# Altium PCB SUBBOARD-sensors.PcbDoc (part 1 of 2)
Units mm, origin at the board's own origin, x right, y up, seen from the top; angles counter-clockwise.
Board outline 150 x 85 mm, 2 copper layers (Top Layer, Bottom Layer), stack 1.639 mm thick; 142 components, 91 nets, 388 pads, 124 vias.
Unrouted connection lines stored in the file: 3.
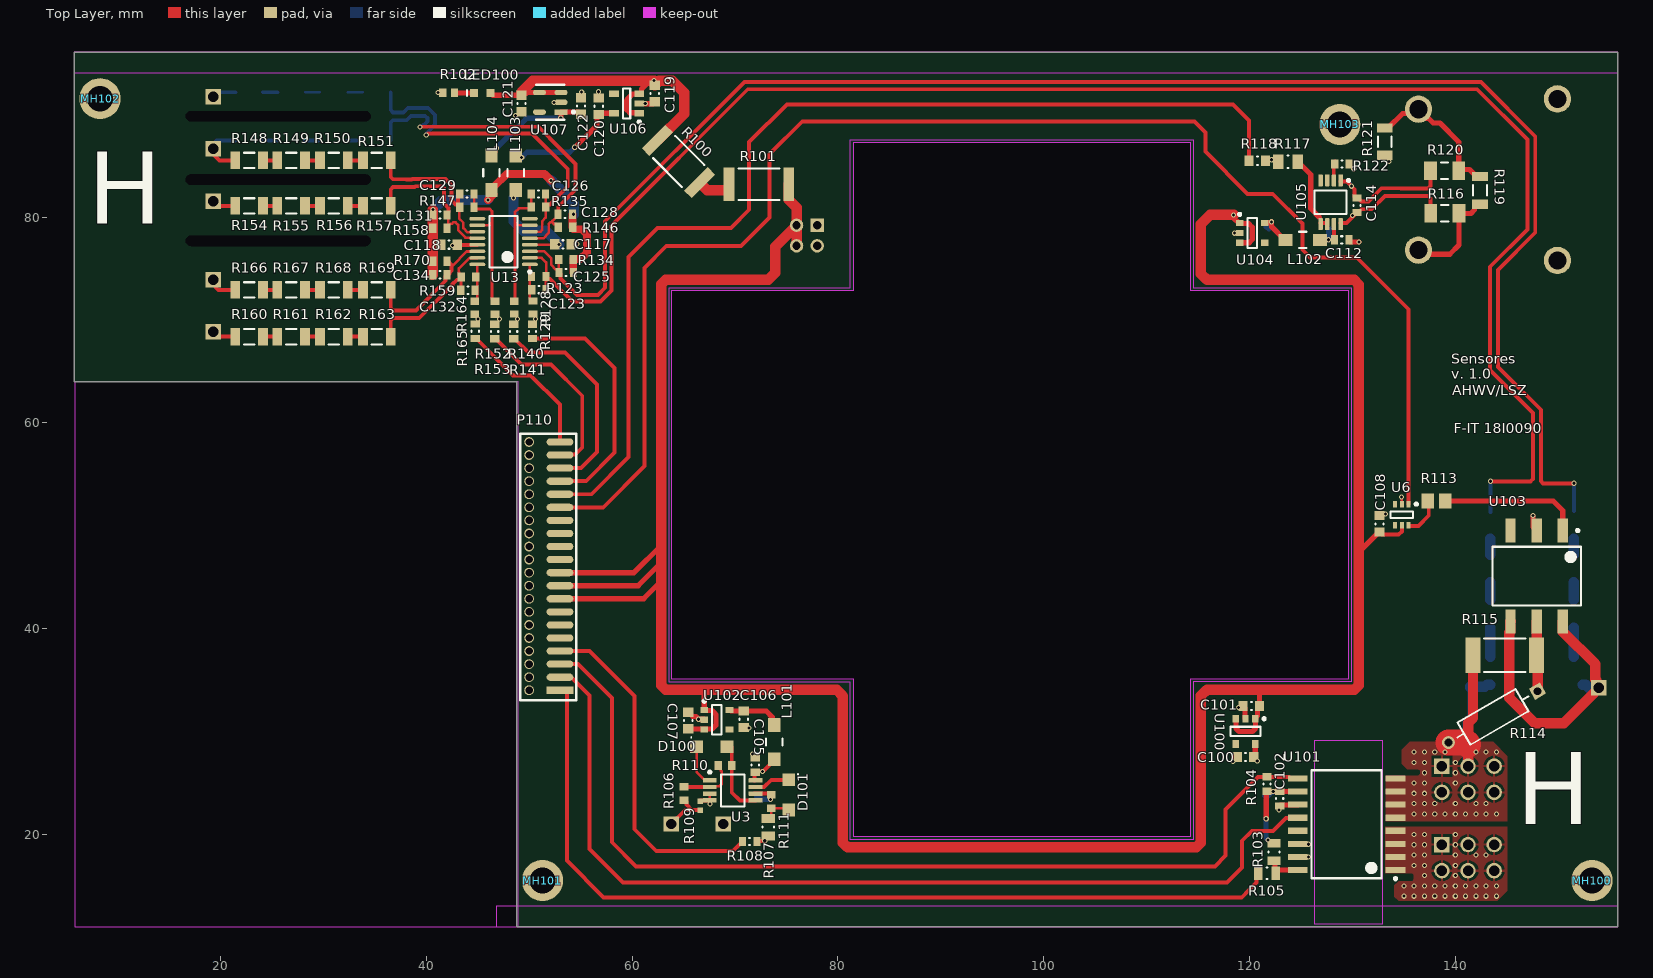
[diagram p0: Top Layer view]
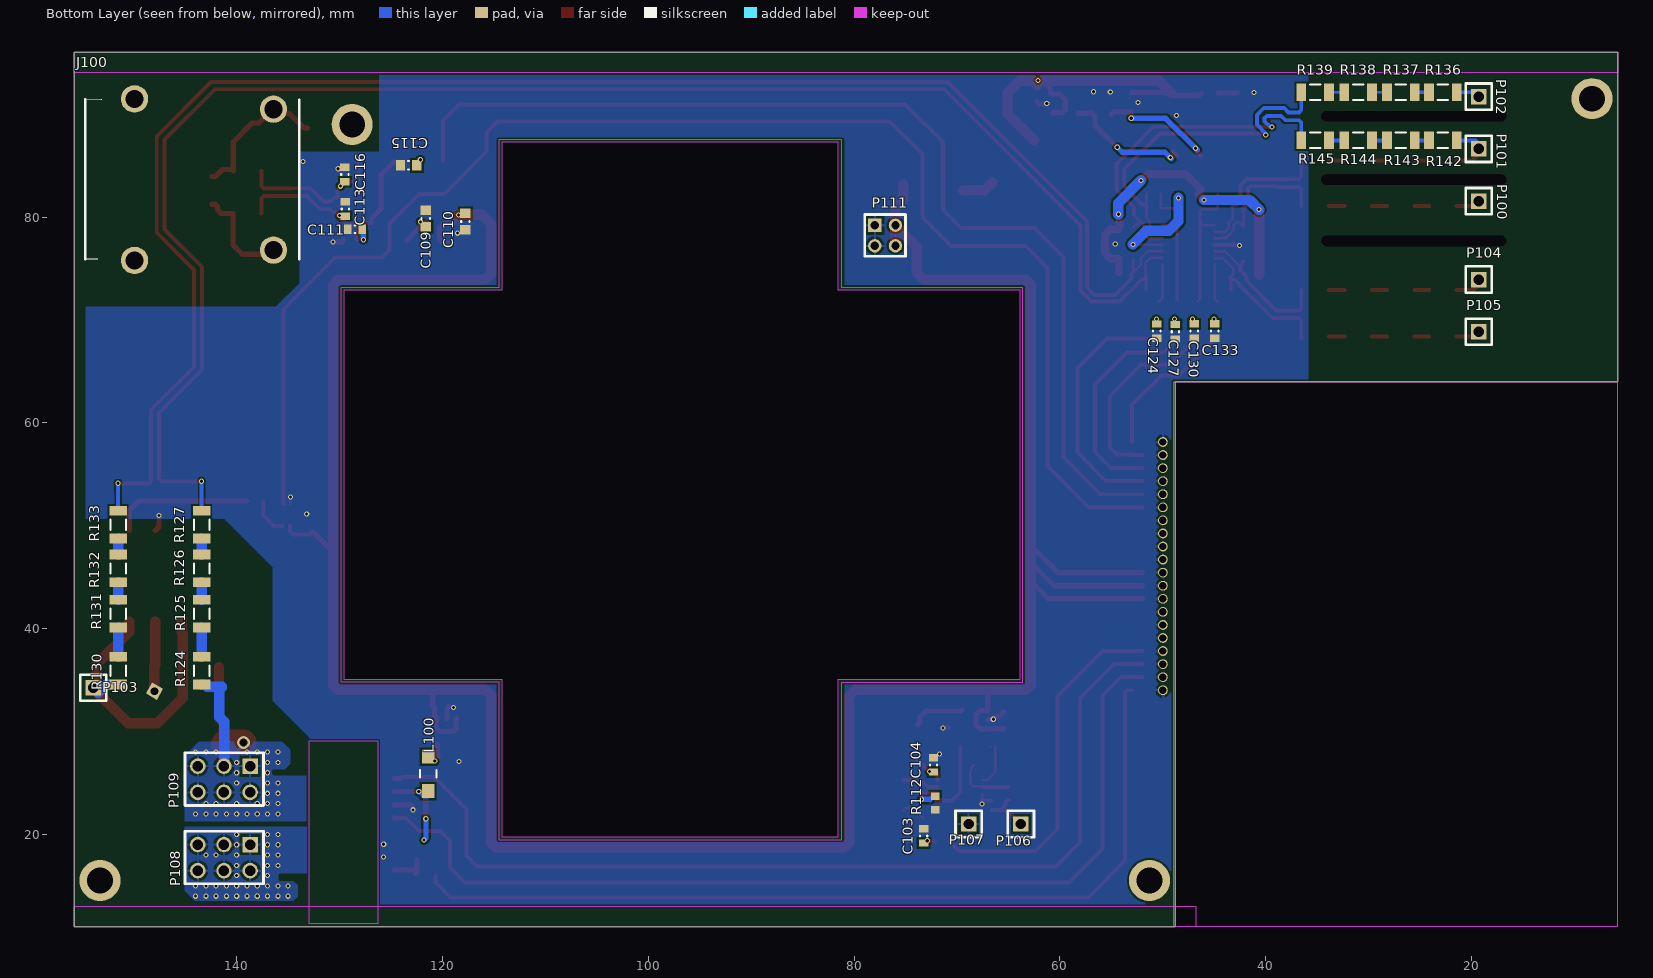
[diagram p1: Bottom Layer view, seen from below]

## Layer stack, top to bottom
Top Solder: solder mask 0.0254, SM-001, Dk 4
Top Layer: signal copper 0.07
Dielectric 1: core 1.4986, Core-043, Dk 4.3
Bottom Layer: signal copper 0.07
Bottom Solder: solder mask 0.0254, SM-001, Dk 4

## Board outline
5.778,64.017 48.778,64.017 48.778,11.017 155.778,11.017 155.778,96.017 5.778,96.017
cut-out: 81.538,87.284 114.218,87.284 114.218,72.879 129.611,72.879 129.611,35.079 114.218,35.079 114.218,19.774 81.538,19.774 81.538,35.079 63.861,35.079 63.861,72.879 81.538,72.879

## Design rules (kind name [scope] priority, off if disabled: settings)
Clearance [All] p1: gap=0.203 ignorepadtopadclearanceinfootprint=FALSE except(0: Arc-Hole Track-Hole SMDPad-Hole THPad-Hole Via-Hole Fill-Hole Poly-Hole Region-Hole Text-Hole)
DiffPairsRouting [All] p1: maxlimit=0.508 minlimit=0.254 mostfreqgap=0.381 toplayer_minwidth=0.254 toplayer_maxwidth=0.381 toplayer_prefwidth=0.381 bottomlayer_minwidth=0.254 bottomlayer_maxwidth=0.381 bottomlayer_prefwidth=0.381 maxuncoupledlength=12.7
PolygonConnect [All] p1: thpad.connectstyle=Relief thpad.reliefconductorwidth=0.254 thpad.reliefentries=4 thpad.polygonreliefangle="90 Angle" thpad.airgapwidth=0.254 smdpad.connectstyle=Direct smdpad.reliefconductorwidth=0.254 smdpad.reliefentries=4 smdpad.polygonreliefangle="90 Angle" smdpad.airgapwidth=0.254 via.connectstyle=Direct via.reliefconductorwidth=0.254 via.reliefentries=4 via.polygonreliefangle="90 Angle" via.airgapwidth=0.254
RoomDefinition U_voltage_sensor_HiZ_OpAmp [InComponentClass('U_voltage_sensor_HiZ_OpAmp')] p1: confinementstyle=ConfineIn formatcopy=TRUE lockcomponents=FALSE outline 1.158,24.272 161.87,24.272 161.87,145.489 1.158,145.489
RoomDefinition SUBBOARD-sensors [InComponentClass('SUBBOARD-sensors')] p2: confinementstyle=ConfineIn formatcopy=TRUE lockcomponents=FALSE outline 0,7.887 163.746,7.887 163.746,107.299 0,107.299
RoomDefinition U_sstate_relay_discharge [InComponentClass('U_sstate_relay_discharge')] p3: confinementstyle=ConfineIn formatcopy=TRUE lockcomponents=FALSE outline 131.654,26.945 178.44,26.945 178.44,60.655 131.654,60.655
RoomDefinition U_thermocouple [InComponentClass('U_thermocouple')] p4: confinementstyle=ConfineIn formatcopy=TRUE lockcomponents=FALSE outline 115.868,75.941 167.994,75.941 167.994,89.532 115.868,89.532
RoomDefinition U_current_sensor_transformer [InComponentClass('U_current_sensor_transformer')] p5: confinementstyle=ConfineIn formatcopy=TRUE lockcomponents=FALSE outline 57.583,4.224 78.67,4.224 78.67,34.574 57.583,34.574
RoomDefinition U_current_sensor_hall [InComponentClass('U_current_sensor_hall')] p6: confinementstyle=ConfineIn formatcopy=TRUE lockcomponents=FALSE outline 144.91,34.824 114.517,34.824 114.517,4.99 144.91,4.99
RoutingVias [All] p1: holewidth=0.711 width=1.27 viastyle="Through Hole" minholewidth=0.3 minwidth=0.5 maxholewidth=0.711 maxwidth=1.27
SolderMaskExpansion [All] p1: expansion=0.102 istentingtop=FALSE
Width [All] p1: maxlimit=2.54 minlimit=0.254 preferedwidth=0.508
29 further rules are at their usual default settings.

## Classes and differential pairs
component class U_sstate_relay_discharge: C108 R113 R114 R115 U6 U103
component class U_thermocouple: C109 C110 C111 C112 C113 C114 C115 C116 L102 R116 R117 R118 R119 R120 R121 R122 U104 U105
component class U_current_sensor_transformer: C103 C104 C105 C106 C107 D100 D101 L101 R106 R107 R108 R109 R110 R111 R112 U3 U102
component class SUBBOARD-sensors: J100 LED100 MH100 MH101 MH102 MH103 P100 P101 P102 P103 P104 P105 P106 P107 P108 P109 P110 P111 R100 R101 R102
component class U_voltage_sensor_HiZ_OpAmp: C117 C118 C119 C120 C121 C122 C123 C124 C125 C126 C127 C128 C129 C130 C131 C132 C133 C134 L103 L104 R123 R124 R125 R126 R127 R128 R129 R130 R131 R132 R133 R134 R135 R136 R137 R138 R139 R140 R141 R142 R143 R144 R145 R146 R147 R148 R149 R150 R151 R152 R153 R154 R155 R156 R157 R158 R159 R160 R161 R162 R163 R164 R165 R166 R167 R168 R169 R170 U13 U106 U107
component class U_current_sensor_hall: C100 C101 C102 L100 R103 R104 R105 U100 U101
differential pair TCKF: +TCKF_P -TCKF_N
differential pair Ch4: +Ch4_P -Ch4_N
differential pair Ch3: +Ch3_P -Ch3_N
differential pair Ch2: +Ch2_P -Ch2_N
differential pair Ch1: +Ch1_P -Ch1_N

## Components (designator, comment, footprint, x,y, rotation, side; value= is the part's Value field where it differs from the comment)
C100 "CAP 1uF 50V 0603(1608)" CAPC0603(1608)100_N 119.606,27.522 r0 top value=1uF
C101 "CAP 1uF 50V 0603(1608)" CAPC0603(1608)100_N 120.174,32.484 r0 top value=1uF
C102 "CAP 100nF 10V 0603(1608)" CAPC0603(1608)100_L 122.93,23.477 r90 top value=100nF
C103 "CAP 100nF 10V 0603(1608)" CAPC0603(1608)100_L 73.232,19.859 r270 bottom value=100nF
C104 "CAP 1uF 50V 0603(1608)" CAPC0603(1608)100_L 72.28,26.766 r270 bottom value=1uF
C105 "CAP 100nF 10V 0603(1608)" CAPC0603(1608)100_L 71.961,26.755 r270 top value=100nF
C106 "CAP 1uF 50V 0603(1608)" CAPC0603(1608)100_N 70.833,31.198 r90 top value=1uF
C107 "CAP 1uF 50V 0603(1608)" CAPC0603(1608)100_N 65.437,31.079 r270 top value=1uF
C108 "CAP 1uF 50V 0603(1608)" CAPC0603(1608)100_N 132.63,50.193 r270 top value=1uF
C109 "CAP 1uF 50V 0603(1608)" CAPC0603(1608)100_N 121.621,79.872 r270 bottom value=1uF
C110 "CAP 1uF 50V 0603(1608)" CAPC0603(1608)100_N 117.776,79.576 r90 bottom value=1uF
C111 "CAP 1uF 50V 0603(1608)" CAPC0603(1608)100_L 128.498,78.827 r180 bottom value=1uF
C112 "CAP 100nF 50V 0603(1608)" CAPC0603(1608)100_L 128.96,77.794 r180 top value=100nF
C113 "CAP 1nF 25V 0603(1608)" CAPC0603(1608)100_L 129.441,80.791 r270 bottom value=1nF
C114 "CAP 10nF 25V 0603(1608)" CAPC0603(1608)100_L 130.454,81.151 r90 top value=10nF
C115 "CAP 100nF 10V 0603(1608)" CAPC0603(1608)100_N 123.29,85.039 r180 bottom value=100nF
C116 "CAP 1nF 25V 0603(1608)" CAPC0603(1608)100_L 129.489,84.147 r90 bottom value=1nF
C117 "CAP 100nF 10V 0603(1608)" CAPC0603(1608)100_N 53.257,77.355 r180 top value=100nF
C118 "CAP 100nF 10V 0603(1608)" CAPC0603(1608)100_N 42.197,77.329 r180 top value=100nF
C119 "CAP 1uF 50V 0603(1608)" CAPC0603(1608)100_N 62.185,92.027 r90 top value=1uF
C120 "CAP 1uF 50V 0603(1608)" CAPC0603(1608)100_N 56.743,90.78 r270 top value=1uF
C121 "CAP 100nF 10V 0603(1608)" CAPC0603(1608)100_N 49.23,91.039 r90 top value=100nF
C122 "CAP 100nF 10V 0603(1608)" CAPC0603(1608)100_N 55.022,90.796 r270 top value=100nF
C123 "CAP 47pF 50V 0603(1608)" CAPC0603(1608)100_L 50.927,72.953 r180 top value=47pF
C124 "CAP 100nF 10V 0603(1608)" CAPC0603(1608)100_L 50.576,68.929 r90 bottom value=100nF
C125 "CAP 47pF 50V 0603(1608)" CAPC0603(1608)100_L 53.579,74.614 r0 top value=47pF
C126 "CAP 47pF 50V 0603(1608)" CAPC0603(1608)100_L 50.881,82.261 r180 top value=47pF
C127 "CAP 100nF 10V 0603(1608)" CAPC0603(1608)100_L 48.768,68.865 r90 bottom value=100nF
C128 "CAP 47pF 50V 0603(1608)" CAPC0603(1608)100_L 53.485,80.278 r0 top value=47pF
C129 "CAP 47pF 50V 0603(1608)" CAPC0603(1608)100_L 43.93,82.242 r0 top value=47pF
C130 "CAP 100nF 10V 0603(1608)" CAPC0603(1608)100_L 46.933,68.931 r90 bottom value=100nF
C131 "CAP 47pF 50V 0603(1608)" CAPC0603(1608)100_L 41.309,80.2 r180 top value=47pF
C132 "CAP 47pF 50V 0603(1608)" CAPC0603(1608)100_L 44.026,72.899 r0 top value=47pF
C133 "CAP 100nF 10V 0603(1608)" CAPC0603(1608)100_L 44.931,68.931 r90 bottom value=100nF
C134 "CAP 47pF 50V 0603(1608)" CAPC0603(1608)100_L 41.309,74.396 r180 top value=47pF
D100 "NRVB120VLSFT1G" NRVB120VLSFT1G 67.729,28.518 r0 top
D101 "NRVB120VLSFT1G" NRVB120VLSFT1G 75.203,23.839 r270 top
J100 "PRT-13612" PRT-13612 149.916,75.806 r90 bottom
L100 "742792111" SMD-1206 121.39,25.894 r90 bottom
L101 "742792111" SMD-1206 73.813,28.981 r270 top
L102 "742792111" SMD-1206 125.171,77.782 r0 top
L103 "742792111" SMD-1206 48.673,84.329 r270 top
L104 "742792111" SMD-1206 46.318,84.329 r270 top
LED100 "150060BS75000" 0603_A 45.429,92.07 r0 top
MH100 "_MH_2p5_4-round" _MH_2p5_4-round 153.278,15.517 r0 top
MH101 "_MH_2p5_4-round" _MH_2p5_4-round 51.278,15.517 r0 top
MH102 "_MH_2p5_4-round" _MH_2p5_4-round 8.278,91.517 r0 top
MH103 "_MH_2p5_4-round" _MH_2p5_4-round 128.778,89.017 r0 top
P100 "TSW-101-15-G-S" TSW-101-15-G-S 19.278,81.557 r180 bottom
P101 "TSW-101-15-G-S" TSW-101-15-G-S 19.278,86.637 r180 bottom
P102 "TSW-101-15-G-S" TSW-101-15-G-S 19.278,91.717 r180 bottom
P103 "TSW-101-15-G-S" TSW-101-15-G-S 153.938,34.257 r180 bottom
P104 "TSW-101-15-G-S" TSW-101-15-G-S 19.278,73.937 r180 bottom
P105 "TSW-101-15-G-S" TSW-101-15-G-S 19.278,68.857 r180 bottom
P106 "TSW-101-15-G-S" TSW-101-15-G-S 63.778,21.017 r180 bottom
P107 "TSW-101-15-G-S" TSW-101-15-G-S 68.858,21.017 r180 bottom
P108 "TSW-103-15-G-D" TSW-103-15-G-D 138.698,19.017 r270 bottom
P109 "TSW-103-15-G-D" TSW-103-15-G-D 138.698,26.637 r270 bottom
P110 "FTSH-120-01-F-MT" FTSH-120-01-F-MT 52.976,34.017 r180 top
P111 "TMM-102-02-T-D" TMM-102-02-T-D 77.974,79.214 r180 bottom
R100 "Jumper 2512(6432)" RESC2512(6432)_L 64.507,85.417 r315 top value="0.00 Ohm"
R101 "Jumper 2512(6432)" RESC2512(6432)_L 72.308,83.196 r180 top value="0.00 Ohm"
R102 "CRCW060382R0FKEA" RESC1609X50X30LL10T20 42.15,92.091 r180 top value="82 Ohms"
R103 "33K 5% 0805(2012)" RESC0805(2012)_L 122.38,18.302 r90 top value="33000.00 Ohm"
R104 "10K 5% 0603(1608)" RESC0603(1608)_L 121.696,24.901 r90 top value="10000.00 Ohm"
R105 "33K 5% 0805(2012)" RESC0805(2012)_L 121.704,16.23 r0 top value="33000.00 Ohm"
R106 "10000.00 Ohm" RESC1609X55X30LL15T15 65.027,23.978 r270 top
R107 "68R1 1% 0805(2012)" RESC0805(2012)_L 73.232,20.709 r90 top value="68.10 Ohm"
R108 "Jumper 0603(1608)" RESC0603(1608)_L 71.417,19.323 r0 top value="0.00 Ohm"
R109 "100.00 Ohm" RESC1005X40X25NL05T05 66.621,22.79 r270 top
R110 "10000.00 Ohm" RESC1609X55X30LL15T15 69.022,26.71 r180 top
R111 "10000.00 Ohm" RESC1609X55X30LL15T15 73.522,23.197 r270 top
R112 "10000.00 Ohm" RESC1609X55X30LL15T15 72.108,23.052 r270 bottom
R113 "ERA6AEB201V" RESC2013X60X40NL20T25 138.169,52.404 r0 top value="200 Ohm"
R114 "MRS25000C1101FCT00" FP-MRS25-MFG 143.662,31.433 r210 top value=1.1kΩ
R115 "1K 1% 2512(6432)" RESC2512(6432)_M 144.804,37.434 r0 top value="1000.00 Ohm"
R116 "CRCW120610K0FKEAHP" RESC3116X65X50NL20T20 138.986,80.368 r0 top value="10 kOhms"
R117 "68R1 1% 0805(2012)" RESC0805(2012)_N 123.74,85.399 r0 top value="68.10 Ohm"
R118 "Jumper 0603(1608)" RESC0603(1608)_N 120.758,85.488 r0 top value="0.00 Ohm"
R119 "CRCW12060000Z0EB" RESC3216X60X45LL10T20 142.402,82.61 r270 top value="0 Ohms"
R120 "CRCW120610K0FKEAHP" RESC3116X65X50NL20T20 138.96,84.492 r0 top value="10 kOhms"
R121 "ERJ-8GEYJ105V" RESC3216X70X50LL05T20 133.141,87.341 r90 top value="1 MOhms"
R122 "Jumper 0603(1608)" RESC0603(1608)_L 128.974,85.159 r0 top value="0.00 Ohm"
R123 "RC0603FR-0718KL" RESC1608X55X25NL10T15 50.914,74.242 r0 top
R124 "1M 1% 1206(3216)" RESC1206(3216)_L 143.406,35.918 r270 bottom value="1000000.00 Ohm"
R125 "1M 1% 1206(3216)" RESC1206(3216)_L 143.406,41.466 r270 bottom value="1000000.00 Ohm"
R126 "1M 1% 1206(3216)" RESC1206(3216)_L 143.406,45.854 r270 bottom value="1000000.00 Ohm"
R127 "1K 1% 1206(3216)" RESC1206(3216)_L 143.406,50.104 r270 bottom value="1000.00 Ohm"
R128 "ERJ-3EKF68R1V" RESC1608X55X30LL15T15 50.364,71.215 r90 top value="68.1 Ohm"
R129 "Jumper 0603(1608)" RESC0603(1608)_L 50.317,68.899 r90 top value="0.00 Ohm"
R130 "1M 1% 1206(3216)" RESC1206(3216)_L 151.525,35.918 r270 bottom value="1000000.00 Ohm"
R131 "1M 1% 1206(3216)" RESC1206(3216)_L 151.525,41.466 r270 bottom value="1000000.00 Ohm"
R132 "1M 1% 1206(3216)" RESC1206(3216)_L 151.525,45.854 r270 bottom value="1000000.00 Ohm"
R133 "1K 1% 1206(3216)" RESC1206(3216)_L 151.525,50.104 r270 bottom value="1000.00 Ohm"
R134 "RC0603FR-0718KL" RESC1608X55X25NL10T15 53.566,75.89 r0 top
R135 "RC0603FR-0718KL" RESC1608X55X25NL10T15 50.887,80.98 r0 top
R136 "1M 1% 1206(3216)" RESC1206(3216)_L 22.77,92.142 r180 bottom value="1000000.00 Ohm"
R137 "1M 1% 1206(3216)" RESC1206(3216)_L 26.856,92.142 r180 bottom value="1000000.00 Ohm"
R138 "1M 1% 1206(3216)" RESC1206(3216)_L 30.993,92.142 r180 bottom value="1000000.00 Ohm"
R139 "1K 1% 1206(3216)" RESC1206(3216)_L 35.175,92.142 r180 bottom value="1000.00 Ohm"
R140 "ERJ-3EKF68R1V" RESC1608X55X30LL15T15 48.528,71.201 r90 top value="68.1 Ohm"
R141 "Jumper 0603(1608)" RESC0603(1608)_L 48.477,68.886 r90 top value="0.00 Ohm"
R142 "1M 1% 1206(3216)" RESC1206(3216)_L 22.77,87.467 r180 bottom value="1000000.00 Ohm"
R143 "1M 1% 1206(3216)" RESC1206(3216)_L 26.856,87.467 r180 bottom value="1000000.00 Ohm"
R144 "1M 1% 1206(3216)" RESC1206(3216)_L 30.993,87.467 r180 bottom value="1000000.00 Ohm"
R145 "1K 1% 1206(3216)" RESC1206(3216)_L 35.175,87.467 r180 bottom value="1000.00 Ohm"
R146 "RC0603FR-0718KL" RESC1608X55X25NL10T15 53.511,79.015 r0 top
R147 "RC0603FR-0718KL" RESC1608X55X25NL10T15 43.932,80.963 r180 top
R148 "1M 1% 1206(3216)" RESC1206(3216)_L 22.77,85.511 r180 top value="1000000.00 Ohm"
R149 "1M 1% 1206(3216)" RESC1206(3216)_L 26.856,85.511 r180 top value="1000000.00 Ohm"
R150 "1M 1% 1206(3216)" RESC1206(3216)_L 30.993,85.511 r180 top value="1000000.00 Ohm"
R151 "1K 1% 1206(3216)" RESC1206(3216)_L 35.175,85.511 r180 top value="1000.00 Ohm"
R152 "ERJ-3EKF68R1V" RESC1608X55X30LL15T15 46.652,71.198 r90 top value="68.1 Ohm"
R153 "Jumper 0603(1608)" RESC0603(1608)_L 46.628,68.891 r90 top value="0.00 Ohm"
R154 "1M 1% 1206(3216)" RESC1206(3216)_L 22.77,81.091 r180 top value="1000000.00 Ohm"
R155 "1M 1% 1206(3216)" RESC1206(3216)_L 26.856,81.091 r180 top value="1000000.00 Ohm"
R156 "1M 1% 1206(3216)" RESC1206(3216)_L 30.993,81.091 r180 top value="1000000.00 Ohm"
R157 "1K 1% 1206(3216)" RESC1206(3216)_L 35.175,81.091 r180 top value="1000.00 Ohm"
R158 "RC0603FR-0718KL" RESC1608X55X25NL10T15 41.309,78.911 r180 top
R159 "RC0603FR-0718KL" RESC1608X55X25NL10T15 44.086,74.18 r180 top
R160 "1M 1% 1206(3216)" RESC1206(3216)_L 22.77,68.382 r180 top value="1000000.00 Ohm"
R161 "1M 1% 1206(3216)" RESC1206(3216)_L 26.856,68.382 r180 top value="1000000.00 Ohm"
R162 "1M 1% 1206(3216)" RESC1206(3216)_L 30.993,68.382 r180 top value="1000000.00 Ohm"
R163 "1K 1% 1206(3216)" RESC1206(3216)_L 35.175,68.382 r180 top value="1000.00 Ohm"
R164 "ERJ-3EKF68R1V" RESC1608X55X30LL15T15 44.703,71.198 r90 top value="68.1 Ohm"
R165 "Jumper 0603(1608)" RESC0603(1608)_L 44.739,68.915 r90 top value="0.00 Ohm"
R166 "1M 1% 1206(3216)" RESC1206(3216)_L 22.77,72.922 r180 top value="1000000.00 Ohm"
R167 "1M 1% 1206(3216)" RESC1206(3216)_L 26.856,72.922 r180 top value="1000000.00 Ohm"
R168 "1M 1% 1206(3216)" RESC1206(3216)_L 30.993,72.922 r180 top value="1000000.00 Ohm"
R169 "1K 1% 1206(3216)" RESC1206(3216)_L 35.175,72.922 r180 top value="1000.00 Ohm"
R170 "RC0603FR-0718KL" RESC1608X55X25NL10T15 41.309,75.711 r180 top
U3 "OPA2350EA/2K5" DGK0008A_N 69.765,24.287 r0 top
U6 "SN74LVC2G34DCKR" DCK0006A_L 134.806,51.079 r270 top
U13 "OPA4350EA/250G4" TI-DBQ16_L 47.494,77.628 r180 top
U100 "ADP122AUJZ-3.3-R7" ADI-UJ-5_L 119.614,30.021 r270 top
U101 "MCA1101-20-03" SOIC127P1030X265-16N 129.439,20.994 r180 top
U102 "ADP122AUJZ-3.3-R7" ADI-UJ-5_L 68.223,31.153 r0 top
U103 "PVT412LSPBF" SOP254P980X318-6M-PVT412LSPBF 147.909,45.116 r270 top
U104 "ADP122AUJZ-3.3-R7" ADI-UJ-5_L 120.264,78.468 r0 top
U105 "AD8495ARMZ" DGK0008A_L 127.879,81.451 r270 top
U106 "ADP122AUJZ-3.3-R7" ADI-UJ-5_N 59.457,91.05 r180 top
U107 "REF2033AIDDCR" FP-DDC0005A-IPC_C 52.033,91.168 r180 top

## Footprints (in the part's own frame and the unit in brackets; to place one, negate y for a bottom-side part, rotate by r counter-clockwise, add the part's x,y. Pads: shape width x height; smd on the part's side, far side on the other; paste and mask are expansions set on the pad)
0603_A [mm] "Chip LED, 2-Leads, Body 1.6x0.8mm, IPC Medium Density"
  rect 0.8x0.8 smd: 1(-0.8,0) 2(0.8,0)
  silkscreen extent -1.5,-0.3 -1.5,0.3, body extent -0.8,-0.4 0.8,0.4, height 0.7
_MH_2p5_4-round [mm] "Matching hole, 2.5mm hole, 4mm pad (round)"
  round 4 hole 2.5: *(0,0)
ADI-UJ-5_L [mm] "SOT23, 5-Leads, Body 2.9x1.6mm, Pitch 0.95mm, IPC High Density"
  rect 0.75x0.6 smd: 1(-1.225,0.95) 2(-1.225,0) 3(-1.225,-0.95) 4(1.225,-0.95) 5(1.225,0.95)
  silkscreen extent -1.35,-1.45 0.45,1.93, body extent -0.8,-1.45 0.8,1.45, height 1
ADI-UJ-5_N [mm] "SOT23, 5-Leads, Body 2.9x1.6mm, Pitch 0.95mm, IPC Medium Density"
  rect 0.95x0.6 smd: 1(-1.225,0.95) 2(-1.225,0) 3(-1.225,-0.95) 4(1.225,-0.95) 5(1.225,0.95)
  silkscreen extent -1.35,-1.45 0.35,1.92, body extent -0.8,-1.45 0.8,1.45, height 1
CAPC0603(1608)100_L [mm] "Chip Capacitor, Body 1.6x0.8mm, Height 1.0mm, IPC High Density"
  rect 0.7x0.9 smd: 1(-0.7,0) 2(0.7,0)
  silkscreen extent -0.05,-0.35 0.05,0.35, body extent -0.87,-0.47 0.88,0.48, height 1
CAPC0603(1608)100_N [mm] "Chip Capacitor, Body 1.6x0.8mm, Height 1.0mm, IPC Medium Density"
  rect 0.9x1 smd: 1(-0.8,0) 2(0.8,0)
  silkscreen extent -0.05,-0.4 0.05,0.4, body extent -0.87,-0.48 0.88,0.47, height 1
DCK0006A_L [mm] "SOT23, 6-Leads, Body 2.15x1.4mm, Pitch 0.65mm, IPC High Density"
  rrect25% 0.65x0.4 smd: 1(-1.025,0.65) 2(-1.025,0) 3(-1.025,-0.65) 4(1.025,-0.65) 5(1.025,0) 6(1.025,0.65)
  silkscreen extent -1.15,-1.1 0.3,1.53, body extent -1.14,-1 1.14,1, height 0.94
DGK0008A_L [mm] "TSOP, 8-Leads, Body 3.1x3.1mm, Pitch 0.65mm, IPC High Density"
  rrect22% 1.15x0.43 smd: 1(-2.125,0.975) 2(-2.125,0.325) 3(-2.125,-0.325) 4(-2.125,-0.975) 5(2.125,-0.975) 6(2.125,-0.325) 7(2.125,0.325) 8(2.125,0.975)
  silkscreen extent -2.25,-1.55 1.15,1.88, body extent -2.45,-1.5 2.45,1.5, height 0.94
DGK0008A_N [mm] "TSOP, 8-Leads, Body 3.1x3.1mm, Pitch 0.65mm, IPC Medium Density"
  rrect22% 1.35x0.43 smd: 1(-2.225,0.975) 2(-2.225,0.325) 3(-2.225,-0.325) 4(-2.225,-0.975) 5(2.225,-0.975) 6(2.225,-0.325) 7(2.225,0.325) 8(2.225,0.975)
  silkscreen extent -2.35,-1.55 1.15,1.9, body extent -2.45,-1.5 2.45,1.5, height 0.94
FP-DDC0005A-IPC_C [mm]
  rect 1.254x0.532 smd paste+0 mask+0: 1(-1.05,0.95)
  rrect100% 1.254x0.532 smd paste+0 mask+0: 2(-1.05,0) 3(-1.05,-0.95) 4(1.05,-0.95) 5(1.05,0.95)
  silkscreen extent -2.38,-1.7 1.4,1.7, body extent -1.78,-1.55 1.78,1.55, height 0.25
FP-MRS25-MFG [mm]
  rect 1.25x1.25 hole 0.75 paste-1000 mask+0: 1(-5,0)
  round 1.25 hole 0.75 paste-1000 mask+0: 2(5,0)
  silkscreen extent -3.98,-1.25 3.98,1.25, body extent -5.73,-1.35 5.73,1.35, height 0.25
FTSH-120-01-F-MT [mm] "Alojamientos de cables y cabecera .050\" Micro Terminal Strip"
  rect 2.6x0.7 smd: 1(0,0)
  round 0.95 hole 0.71: 2(3,0) 4(3,-1.27) 6(3,-2.54) 8(3,-3.81) 10(3,-5.08) 12(3,-6.35) 14(3,-7.62) 16(3,-8.89) 18(3,-10.16) 20(3,-11.43) 22(3,-12.7) 24(3,-13.97) 26(3,-15.24) 28(3,-16.51) 30(3,-17.78) 32(3,-19.05) 34(3,-20.32) 36(3,-21.59) 38(3,-22.86) 40(3,-24.13)
  oval 2.6x0.7 smd: 3(0,-1.27) 5(0,-2.54) 7(0,-3.81) 9(0,-5.08) 11(0,-6.35) 13(0,-7.62) 15(0,-8.89) 17(0,-10.16) 19(0,-11.43) 21(0,-12.7) 23(0,-13.97) 25(0,-15.24) 27(0,-16.51) 29(0,-17.78) 31(0,-19.05) 33(0,-20.32) 35(0,-21.59) 37(0,-22.86) 39(0,-24.13)
  silkscreen extent -1.6,-24.92 3.85,0.98, body extent -1.11,-24.73 9.79,0.67, height 3.44
NRVB120VLSFT1G [mm] "REEL / AUTO STANDARD OF MBR120VL"
  rect 1.25x1.22 smd: 1(-1.475,0) 2(1.475,0)
  silkscreen extent -2.05,0.86 -1.95,0.96, body extent -1.45,-0.9 1.45,0.9, height 0.98
PRT-13612 [mm] "THERMOCOUPLE CONN - PCC-SMP-K"
  round 2.655 hole 1.77: 1(-0.01,0.01) 2(15.69,0.01) 3(0.99,-13.49) 4(14.69,-13.49)
  silkscreen extent 0.09,-16 15.64,4.81, body extent 0.01,-16.04 15.71,4.76, height 7.65
RESC0603(1608)_L [mm] "Chip Resistor, Body 1.6x0.8mm, IPC High Density"
  rect 0.7x0.9 smd: 1(-0.7,0) 2(0.7,0)
  silkscreen extent -0.05,-0.35 0.05,0.35, body extent -0.85,-0.47 0.85,0.47, height 0.6
RESC0603(1608)_N [mm] "Chip Resistor, Body 1.6x0.8mm, IPC Medium Density"
  rect 0.9x1 smd: 1(-0.8,0) 2(0.8,0)
  silkscreen extent -0.05,-0.4 0.05,0.4, body extent -0.85,-0.47 0.85,0.47, height 0.6
RESC0805(2012)_L [mm] "Chip Resistor, Body 2.0x1.3mm, IPC High Density"
  rect 0.85x1.3 smd: 1(-0.85,0) 2(0.85,0)
  silkscreen extent -0.05,-0.55 0.05,0.55, body extent -1.1,-0.67 1.1,0.68, height 0.7
RESC0805(2012)_N [mm] "Chip Resistor, Body 2.0x1.3mm, IPC Medium Density"
  rect 1.05x1.4 smd: 1(-0.95,0) 2(0.95,0)
  silkscreen extent -0.05,-0.6 0.05,0.6, body extent -1.1,-0.67 1.1,0.68, height 0.7
RESC1005X40X25NL05T05 [mm] "Chip Resistor, 2-Leads, Body 1.00x0.50mm, IPC Medium Density"
  rect 0.55x0.55 smd: 1(-0.45,0) 2(0.45,0)
  body extent -0.53,-0.27 0.53,0.28, height 0.4
RESC1206(3216)_L [mm] "Chip Resistor, Body 3.2x1.6mm, IPC High Density"
  rect 0.95x1.7 smd: 1(-1.35,0) 2(1.35,0)
  silkscreen extent -0.5,-0.75 0.5,0.75, body extent -1.67,-0.87 1.67,0.87, height 0.75
RESC1608X55X25NL10T15 [mm] "Chip Resistor, 2-Leads, Body 1.70x0.90mm, IPC Medium Density"
  rect 0.7x0.9 smd: 1(-0.7,0) 2(0.7,0)
  body extent -0.85,-0.45 0.85,0.45, height 0.55
RESC1608X55X30LL15T15 [mm] "Chip Resistor, 2-Leads, Body 1.60x0.80mm, IPC High Density"
  rect 0.7x0.85 smd: 1(-0.625,0) 2(0.625,0)
  body extent -0.87,-0.48 0.87,0.48, height 0.55
RESC1609X50X30LL10T20 [mm] "Chip Resistor, 2-Leads, Body 1.55x0.85mm, IPC High Density"
  rect 0.7x0.85 smd: 1(-0.575,0) 2(0.575,0)
  body extent -0.82,-0.48 0.82,0.48, height 0.5
RESC1609X55X30LL15T15 [mm] "Chip Resistor, 2-Leads, Body 1.75x0.95mm, IPC High Density"
  rect 0.75x0.85 smd: 1(-0.65,0) 2(0.65,0)
  body extent -0.87,-0.48 0.87,0.48, height 0.55
RESC2013X60X40NL20T25 [mm] "Chip Resistor, 2-Leads, Body 2.00x1.25mm, IPC Medium Density"
  rect 1.2x1.45 smd: 1(-0.85,0) 2(0.85,0)
  body extent -1.1,-0.72 1.1,0.72, height 0.6
RESC2512(6432)_L [mm] "Chip Resistor, Body 6.4x3.2mm, IPC High Density"
  rect 1.05x3.25 smd: 1(-2.9,0) 2(2.9,0)
  silkscreen extent -2,-1.52 2,1.53, body extent -3.25,-1.7 3.25,1.7, height 0.75
RESC2512(6432)_M [mm] "Chip Resistor, Body 6.4x3.2mm, IPC Low Density"
  rect 1.45x3.45 smd: 1(-3.1,0) 2(3.1,0)
  silkscreen extent -2,-1.63 2,1.63, body extent -3.25,-1.7 3.25,1.7, height 0.75
RESC3116X65X50NL20T20 [mm] "Chip Resistor, 2-Leads, Body 3.10x1.60mm, IPC Medium Density"
  rect 1.25x1.8 smd: 1(-1.375,0) 2(1.375,0)
  silkscreen extent -0.35,-0.8 0.35,0.8, body extent -1.65,-0.9 1.65,0.9, height 0.65
RESC3216X60X45LL10T20 [mm] "Chip Resistor, 2-Leads, Body 3.20x1.60mm, IPC High Density"
  rect 0.9x1.6 smd: 1(-1.35,0) 2(1.35,0)
  silkscreen extent -0.5,-0.7 0.5,0.7, body extent -1.65,-0.85 1.65,0.85, height 0.6
RESC3216X70X50LL05T20 [mm] "Chip Resistor, 2-Leads, Body 3.20x1.60mm, IPC High Density"
  rect 0.9x1.55 smd: 1(-1.325,0) 2(1.325,0)
  silkscreen extent -0.5,-0.67 0.5,0.67, body extent -1.63,-0.82 1.62,0.82, height 0.7
SMD-1206 [mm] "Chip Inductor, 2-Leads, Body 3.2x1.6mm"
  rect 1.35x1.2 smd: 1(-1.675,0) 2(1.675,0)
  silkscreen extent -0.35,-0.8 0.35,0.8, body extent -1.6,-0.8 1.6,0.8, height 1.09
SOIC127P1030X265-16N [mm] "SOIC, 16-Leads, Body 10,30x7,50mm, Pitch 1,27mm, IPC Medium Density"
  rect 1.9x0.6 smd: 1(-4.75,4.445) 2(-4.75,3.175) 3(-4.75,1.905) 4(-4.75,0.635) 5(-4.75,-0.635) 6(-4.75,-1.905) 7(-4.75,-3.175) 8(-4.75,-4.445) 9(4.75,-4.445) 10(4.75,-3.175) 11(4.75,-1.905) 12(4.75,-0.635) 13(4.75,0.635) 14(4.75,1.905) 15(4.75,3.175) 16(4.75,4.445)
  silkscreen extent -4.88,-5.25 3.4,5.42, body extent -3.8,-5.25 3.8,5.25, height 2.65
SOP254P980X318-6M-PVT412LSPBF [mm] "SOP, 6-Leads, Body 8,38x6,35mm, Pitch 2,54mm, IPC Low Density - PVT412LSPBF SS-relay"
  rect 2.35x1 smd: 1(-4.425,2.54) 2(-4.425,0) 3(-4.425,-2.54) 4(4.425,-2.54) 5(4.425,0) 6(4.425,2.54)
  silkscreen extent -4.55,-4.3 2.85,4.3, body extent -3.25,-4.3 3.25,4.3, height 3.18
TI-DBQ16_L [mm] "SOP, 16-Leads, Body 4.9x3.9mm, Pitch 0.635mm, IPC High Density"
  oval 1.55x0.35 smd: 1(-2.55,2.222) 2(-2.55,1.587) 3(-2.55,0.952) 4(-2.55,0.317) 5(-2.55,-0.318) 6(-2.55,-0.953) 7(-2.55,-1.588) 8(-2.55,-2.223) 9(2.55,-2.222) 10(2.55,-1.587) 11(2.55,-0.952) 12(2.55,-0.317) 13(2.55,0.318) 14(2.55,0.953) 15(2.55,1.588) 16(2.55,2.223)
  silkscreen extent -2.68,-2.5 1.38,3.07, body extent -2,-2.5 2,2.5, height 1.75
TMM-102-02-T-D [mm]
  rect 1.3x1.3 hole 0.81: 1(0,0)
  round 1.3 hole 0.81: 2(2,0) 3(0,-2) 4(2,-2)
  silkscreen extent -0.97,-3 2.98,1.05, body extent -0.97,-2.99 2.97,1.01, height 5.22
TSW-101-15-G-S [mm]
  rect 1.5x1.5 hole 1.02: 1(0,0)
  silkscreen extent -1.28,-1.28 1.28,1.28, body extent -1.27,-1.27 1.27,1.27, height 15.76
TSW-103-15-G-D [mm]
  rect 1.5x1.5 hole 1.02: 1(0,0)
  round 1.5 hole 1.02: 2(2.54,0) 3(0,-2.54) 4(2.54,-2.54) 5(0,-5.08) 6(2.54,-5.08)
  silkscreen extent -1.3,-6.32 3.83,1.3, body extent -1.28,-6.33 3.8,1.29, height 15.76

## Part data
C100 C101 C104 C106 C107 C108 C109 C110 C111 C119 C120: library part CMP-1035-02746-1, "CAP 1uF 50V ±20% 0603 (1608 Metric) Thickness 1mm SMD", Case-EIA=0603, Case-Metric=1608, Rated Voltage="50 V", Tolerance=Â±20%, Max Thickness="1 mm", Technology=SMT
C102 C103 C105 C115 C117 C118 C121 C122 C124 C127 C130 C133: library part CMP-1035-02580-1, "CAP 100nF 10V ±10% 0603 (1608 Metric) Thickness 1mm SMD", Case-EIA=0603, Case-Metric=1608, Rated Voltage="10 V", Tolerance=Â±10%, Max Thickness="1 mm", Technology=SMT
C112: library part CMP-1035-02591-1, "CAP 100nF 50V ±5% 0603 (1608 Metric) Thickness 1mm SMD", Case-EIA=0603, Case-Metric=1608, Rated Voltage="50 V", Tolerance=Â±5%, Max Thickness="1 mm", Technology=SMT
C113 C116: library part CMP-1035-01883-1, "CAP 1nF 25V ±5% 0603 (1608 Metric) Thickness 1mm SMD", Case-EIA=0603, Case-Metric=1608, Rated Voltage="25 V", Tolerance=Â±5%, Max Thickness="1 mm", Technology=SMT
C114: library part CMP-1035-02316-1, "CAP 10nF 25V ±5% 0603 (1608 Metric) Thickness 1mm SMD", Case-EIA=0603, Case-Metric=1608, Rated Voltage="25 V", Tolerance=Â±5%, Max Thickness="1 mm", Technology=SMT
C123 C125 C126 C128 C129 C131 C132 C134: library part CMP-1035-01063-1, "CAP 47pF 50V ±5% 0603 (1608 Metric) Thickness 1mm SMD", Case-EIA=0603, Case-Metric=1608, Rated Voltage="50 V", Tolerance=Â±5%, Max Thickness="1 mm", Technology=SMT
D100 D101: "REEL / AUTO STANDARD OF MBR120VL", Average Rectified Current=1A, Case/Package=SOD, Manufacturer="ON Semiconductor", Max Operating Temperature=125°C, Max Repetitive Reverse Voltage (Vrrm)=20V, Min Operating Temperature=-65°C, Peak Non-Repetitive Surge Current=45A, Peak Reverse Current=15mA, Supplier Part Number 1=NRVB120VLSFT1GOSCT-ND, ComponentLink1Description=http://www.mouser.com/ds/2/308/MBR120VLSFT1-D-1074021.pdf?src-supplier=Mouser, ComponentLink1URL=http://www.mouser.com/ds/2/308/MBR120VLSFT1-D-1074021.pdf?src-supplier=Mouser, ComponentLink2Description=http://www.farnell.com/datasheets/2028665.pdf?src-supplier=Farnell, ComponentLink2URL=http://www.farnell.com/datasheets/2028665.pdf?src-supplier=Farnell, ComponentLink3Description=http://www.onsemi.com/pub/Collateral/MBR120VLSFT1-D.PDF?src-supplier=Avnet, ComponentLink3URL=http://www.onsemi.com/pub/Collateral/MBR120VLSFT1-D.PDF?src-supplier=Avnet, ComponentLink4Description=http://www.farnell.com/datasheets/2028665.pdf?src-supplier=Element14, ComponentLink4URL=http://www.farnell.com/datasheets/2028665.pdf?src-supplier=Element14, ComponentLink5Description=http://www.onsemi.com/pub/Collateral/MBR120VLSFT1-D.PDF?src-supplier=Digi-Key, ComponentLink5URL=http://www.onsemi.com/pub/Collateral/MBR120VLSFT1-D.PDF?src-supplier=Digi-Key, ComponentLink6Description=http://www.farnell.com/datasheets/2028665.pdf?src-supplier=Newark, ComponentLink6URL=http://www.farnell.com/datasheets/2028665.pdf?src-supplier=Newark, Element Configuration=Single, Lead Free="Lead Free", Manufacturer Part Number=NRVB120VLSFT1G, Max Reverse Voltage (DC)=20V, Mount="Surface Mount", Number of Pins=2, Packaging="Tape and Reel", Pricing 1="1 = 0.43000, 10 = 0.36700, 25 = 0.34240, 100 = 0.25430, 250 = 0.24156, 500 = 0.19854, 1000 = 0.16137 (USD)", RoHS=Yes, Stock 1=5674, Supplier 1=Digi-Key
J100: "THERMOCOUPLE CONN - PCC-SMP-K", Manufacturer=SparkFun, Supplier Part Number 1=1568-1306-ND, ComponentLink1Description=https://cdn.sparkfun.com/datasheets/Prototyping/PCC-SMP-K-datasheet.pdf?src-supplier=Digi-Key, ComponentLink1URL=https://cdn.sparkfun.com/datasheets/Prototyping/PCC-SMP-K-datasheet.pdf?src-supplier=Digi-Key, Manufacturer Part Number=PRT-13612, Pricing 1="1=4.38000 (USD)", RoHS=No, Stock 1=201, Supplier 1=Digi-Key, System=Connector
L100 L101 L102 L103 L104: library part CMP-0220-00024-1, "SMD EMI Suppression Ferrite Bead WE-CBF, Z = 26 Ohm", ComponentLink1Description="Manufacturer Link", ComponentLink1URL=http://www.we-online.com, ComponentLink2Description=Datasheet, ComponentLink2URL=http://www.we-online.de/katalog/media/pdf/742792111.pdf, DatasheetVersion=Dec-2005, Impedance="26 Ohm", PackageDescription="Chip Inductor, 2-Leads, Body 3.2 x 1.6 mm", PackageReference=SMD-1206, PackageVersion=2007
LED100: library part CMP-1426-00003-1, "SMD mono-color Chip LED, WL-SMCW, Blue", Color=Blue, Manufacturer="Wuerth Elektronik", ComponentLink1Description="Manufacturer URL", ComponentLink1URL=http://www.we-online.com, ComponentLink2Description=Datasheet, ComponentLink2URL=http://katalog.we-online.com/led/datasheet/150060BS75000.pdf, PackageReference=0603_A, PartNumber=150060BS75000
MH100 MH101 MH102 MH103: "matching hole 2.5 hole, 4mm pad (round)"
P100 P101 P102 P103 P104 P105 P106 P107: "Conn Unshrouded Header HDR 1 POS Solder ST Thru-Hole", Housing Color=Black, Manufacturer=Samtec, Max Current Rating=7.6A, Max Operating Temperature=125°C, Max Voltage Rating (AC)=550V, Min Operating Temperature=-55°C, Supplier Part Number 1=TSW-101-15-G-S-ND, Category=Connectors, ComponentLink1Description=https://datasheet.ciiva.com/16736/htsw-th-16736491.pdf?src-supplier=Avnet+Europe, ComponentLink1URL=https://datasheet.ciiva.com/16736/htsw-th-16736491.pdf?src-supplier=Avnet+Europe, ComponentLink2Description=https://datasheet.ciiva.com/10337/htsw-th-10337087.pdf?src-supplier=Avnet, ComponentLink2URL=https://datasheet.ciiva.com/10337/htsw-th-10337087.pdf?src-supplier=Avnet, Contact Material=Bronze, Contact Plating=Gold, Depth=2.54mm, Gender=Male, Housing Material=Polyester, Length=2.54mm, Manufacturer Part Number=TSW-101-15-G-S, Mount="Through Hole", Number of Contacts=1, Number of Rows=1, Orientation=Straight, Packaging=Bulk, Pricing 1="1=0.16000 (USD)", Radiation Hardening=No, REACH SVHC="No SVHC", RoHS=Yes, Stock 1=1116, Supplier 1=Digi-Key, System=Connector, Termination=Solder
P108 P109: ".025\" SQ. TERMINAL STRIPS", Housing Color=Black, Manufacturer=Samtec, Max Current Rating=7.6A, Max Operating Temperature=125°C, Max Voltage Rating (AC)=550V, Min Operating Temperature=-55°C, Supplier Part Number 1=SAM12306-ND, Category="Headers and Wire Housings", ComponentLink1Description=https://datasheet.ciiva.com/16723/htsw-th-16723063.pdf?src-supplier=Avnet+Europe, ComponentLink1URL=https://datasheet.ciiva.com/16723/htsw-th-16723063.pdf?src-supplier=Avnet+Europe, ComponentLink2Description=https://datasheet.ciiva.com/29947/htsw-th-29947802.pdf?src-supplier=Avnet, ComponentLink2URL=https://datasheet.ciiva.com/29947/htsw-th-29947802.pdf?src-supplier=Avnet, Contact Material=Bronze, Contact Plating=Gold, Depth=5.08mm, Gender=Male, Housing Material=Polyester, Length=7.62mm, Manufacturer Part Number=TSW-103-15-G-D, Number of Contacts=6, Number of Rows=2, Orientation=Straight, Packaging=Bulk, Pitch=2.54mm, Pricing 1="1=0.78000, 10=0.73200, 100=0.56120, 500=0.48800, 1000=0.40260, 5000=0.35380, 10000=0.32940 (USD)", Radiation Hardening=No, REACH SVHC="No SVHC", RoHS=Yes, Row Spacing=2.54mm, Stock 1=480, Supplier 1=Digi-Key, System=Connector, Termination=Solder
P110: "Conn Unshrouded Header HDR 40 POS 1.27mm Solder RA Thru-Hole/SMD Tube", Housing Color=Black, Manufacturer=Samtec, Max Operating Temperature=125°C, Min Operating Temperature=-55°C, Supplier Part Number 1=FTSH-120-01-F-MT-ND, Category="Headers and Wire Housings", ComponentLink1Description=https://datasheet.ciiva.com/16697/ftsh-mt-16697612.pdf?src-supplier=Avnet+Europe, ComponentLink1URL=https://datasheet.ciiva.com/16697/ftsh-mt-16697612.pdf?src-supplier=Avnet+Europe, Contact Material=Bronze, Contact Plating=Gold, Depth=10.64mm, Gender=Male, Housing Material=Polymer, Lead Free="Lead Free", Length=25.4mm, Manufacturer Part Number=FTSH-120-01-F-MT, Number of Contacts=40, Number of Rows=2, Orientation="Right Angle", Packaging=Rail/Tube, Pitch=1.27mm, Pricing 1="1=5.48000 (USD)", Pricing 2="1=5.23577, 10=4.92660, 30=4.79780, 50=4.57240, 100=4.37920 (USD)", Pricing 3="1=5.48000, 10=5.04000, 25=4.62000, 50=4.43000, 100=4.21000, 250=3.68000, 500=3.57000 (USD)", Radiation Hardening=No, RoHS=Yes, Stock 1=47, Supplier 1=Digi-Key, Supplier 2=Avnet, Supplier 3=Newark, Supplier Part Number 2=FTSH-120-01-F-MT, Supplier Part Number 3=01R7043, System=Connector, Termination=Solder
P111: "SAMTEC         TMM-102-02-T-D             Board-To-Board Connector, TMM Series, 4 Contacts, Header, 2 mm, Through Hole, 2 Rows", Manufacturer=Samtec, Supplier Part Number 1=TMM-102-02-T-D-ND, Category=Connectors, ComponentLink1Description=http://www.farnell.com/datasheets/2047777.pdf?src-supplier=Farnell, ComponentLink1URL=http://www.farnell.com/datasheets/2047777.pdf?src-supplier=Farnell, ComponentLink2Description=ftp://ftp.samtec.com/webfiles/PDF/TMM_TH.PDF?src-supplier=Avnet, ComponentLink2URL=ftp://ftp.samtec.com/webfiles/PDF/TMM_TH.PDF?src-supplier=Avnet, Contact Material=Bronze, Contact Plating=Tin, Gender=Male, Lead Free="Lead Free", Manufacturer Part Number=TMM-102-02-T-D, Mount="Through Hole", Number of Contacts=4, Number of Rows=2, Packaging=Bulk, Pitch=2mm, Pricing 1="1=0.36000 (USD)", Radiation Hardening=No, REACH SVHC="No SVHC", RoHS=Yes, Stock 1=996, Supplier 1=Digi-Key, System=Connector, Termination=Solder
R100 R101: library part CMP-1018-00001-1, "Jumper 2512 (6432 Metric)", Case-EIA=2512, Case-Metric=6432, Power=None, Technology=SMT, Tolerance=None
R102: library part CMP-2000-03606-1, Manufacturer="Vishay Dale", Part Number=CRCW060382R0FKEA
R103 R105: library part CMP-1013-00110-1, "33K 0.125W 5% 0805 (2012 Metric)  SMD", Case-EIA=0805, Case-Metric=2012, Power="0.125 W", Tolerance="5 %", Technology=SMT
R104: library part CMP-1012-00098-1, "10K 0.1W 5% 0603 (1608 Metric)  SMD", Case-EIA=0603, Case-Metric=1608, Power="0.1 W", Tolerance="5 %", Technology=SMT
R106 R110 R111 R112: library part CMP-2000-07452-1, "Chip Resistor, 10 KOhm, +/- 1%, 0.1 W, -55 to 155 degC, 0603 (1608 Metric), RoHS, Tape and Reel", Case Code (Imperial)=0603, Case Code (Metric)=1608, Manufacturer=Panasonic, Max Operating Temperature=155degC, Max Power Dissipation=100mW, Min Operating Temperature=-55degC, Package Description="2-Pin Surface Mount Device, Body 1.6 x 0.85 mm", Package Quantity=1, Package Reference=603, Resistance=10KOhm, Temperature Coefficient=100ppm\/degreesC, Tolerance=1%, Voltage Rating=75V, Case\/Package=0603, Composition=ThickFilm, Contact Plating=Tin, Datasheet URL=https://industrial.panasonic.com/cdbs/www-data/pdf/RDA0000/AOA0000C304.pdf, Datasheet Version=02/2017, Depth=0.8mm, Height=0.45mm, Lead Free=LeadFree, Length=1.6mm, Manufacturer URL=http://www.panasonic.com/, Military Standard=Not, Mount=SurfaceMount, Mounting Technology=SurfaceMount, Number of Pins=2, Number of Terminations=2, Packaging=TapeandReel, Power rating=100mW, Radiation Hardening=No, REACH SVHC=NoSVHC, RoHSCompliant=true, Termination=SMD/SMT, Voltage Rating (DC)=75V, Width=0.031inch
R107 R117: library part CMP-1013-00379-1, "68R1 0.125W 1% 0805 (2012 Metric)  SMD", Case-EIA=0805, Case-Metric=2012, Power="0.125 W", Tolerance="1 %", Technology=SMT
R108 R118 R122 R129 R141 R153 R165: library part CMP-1012-00001-1, "Jumper 0603 (1608 Metric)", Case-EIA=0603, Case-Metric=1608, Power=None, Technology=SMT, Tolerance=None
R109: library part CMP-2002-08127-1, Manufacturer="Vishay Dale", Part Number=CRCW0402100RFKED
R113: library part CMP-2001-00608-1, Manufacturer=Panasonic, Package=0805, Part Number=ERA6AEB201V
R114: library part CMP-02408-000003-1, "RES 1.1K OHM 0.6W 1% AXIAL", Manufacturer="Vishay BC Components", Package=MRS25, Power rating=0.6W, Resistance=1.1kΩ, Temperature="-55°C to +155°C", Temperature Coefficient=50ppm/°C, Temperature Range High=+155°C, Temperature Range Low=-55°C, Tolerance=1%, Voltage Rating=350V, Automotive=No, Category=Res, ComponentLink2Description=Datasheet, ComponentLink2URL=http://www.vishay.com/docs/28724/mrs16m25.pdf, Composition="Thin Film", Device Class L1="Passive Components", Device Class L2=Resistors, Device Class L3="Through-Hole Resistors", Digikey Description="RES 1.1K OHM 0.6W 1% AXIAL", Height=2.5mm, Ipc Land Pattern Name=RESAD1000W75L650D250, Lead Free=Yes, Manufacturer Part Number=MRS25000C1101FCT00, Mouser Description="Thin Film Resistors .6watt 1.1Kohms 1%", Octopart=https://octopart.com/mrs25000c1101fct00-vishay-43740214, RoHS=TRUE, Series=MRS25
R115: library part CMP-1018-00510-1, "1K 1W 1% 2512 (6432 Metric)  SMD", Case-EIA=2512, Case-Metric=6432, Power="1 W", Tolerance="1 %", Technology=SMT
R116 R120: library part CMP-2003-04883-1, Manufacturer="Vishay Dale", Package=1206, Part Number=CRCW120610K0FKEAHP, Precision=1%
R119: library part CMP-2003-04797-1, Manufacturer="Vishay Dale", Package=1206, Part Number=CRCW12060000Z0EB
R121: library part CMP-2003-00547-1, Manufacturer=Panasonic, Package=1206, Part Number=ERJ-8GEYJ105V, Precision=5%
R123 R134 R135 R146 R147 R158 R159 R170: library part CMP-2000-06930-1, "Chip Resistor, 18 KOhm, +/- 1%, 0.1 W, -55 to 155 degC, 0603 (1608 Metric), RoHS, Tape and Reel", Case Code - in=0603, Case Code - mm=1608, Manufacturer=Yageo, Operating Temperature Range=-55Cto+155C, Package / Case=0603(1608metric), Package Description="2-Pin Surface Mount Device, Body 1.6 x 0.8 mm", Power rating=100mW, Resistance=18kOhms, Temperature Coefficient=100PPM/C, Tolerance=1%, Voltage Rating=75V, Brand=Yageo, Datasheet URL=http://www.yageo.com/documents/recent/PYu-RC_Group_51_RoHS_L_7.pdf, Datasheet Version="Rev. 7, 05/2017", Height=0.45mm, Length=1.6mm, Manufacturer URL=http://www.yageo.com/, Mounting Technology=SurfaceMount, Package Reference=0603, Packaging=Reel, Product=ThickFilmResistorsGeneralPurpose, Product Category=ThickFilmResistors, RoHS=True, Series=RC, Termination Style=SMD/SMT, Type=GeneralPurposeChipResistorSurfaceMount, Unit Weight=0.000071oz, Width=0.8mm
R124 R125 R126 R130 R131 R132 R136 R137 R138 R142 R143 R144 R148 R149 R150 R154 R155 R156 R160 R161 R162 R166 R167 R168: library part CMP-1014-00849-1, "1M 0.25W 1% 1206 (3216 Metric)  SMD", Case-EIA=1206, Case-Metric=3216, Power="0.25 W", Tolerance="1 %", Technology=SMT
R127 R133 R139 R145 R151 R157 R163 R169: library part CMP-1014-00510-1, "1K 0.25W 1% 1206 (3216 Metric)  SMD", Case-EIA=1206, Case-Metric=3216, Power="0.25 W", Tolerance="1 %", Technology=SMT
R128 R140 R152 R164: library part CMP-2000-00621-1, Manufacturer=Panasonic, Package=0603, Tolerance=1%, Part Number=ERJ-3EKF68R1V
U3: "High-Speed, Single-Supply, Rail-to-Rail Operational Amplifier MicroAmplifier(TM) Series, 2.7 to 5.5 V, -40 to 85 degC, 8-pin SOP (DGK8), Green (RoHS & no Sb/Br)", Manufacturer="Texas Instruments", Supplier Part Number 1=296-39117-1-ND, Total Supply Voltage(Max)(+5V is 5, +/-5V is 10)=5.5, Total Supply Voltage(Min)(+5V is 5, +/-5V is 10)=2.7, CMRR(Min)(dB)=74, Code_JEDEC=MO-187, ComponentLink1Description="Manufacturer URL", ComponentLink1URL=http://www.ti.com/, ComponentLink2Description=Datasheet, ComponentLink2URL=http://www.ti.com/general/docs/lit/getliterature.tsp?genericPartNumber=OPA2350&fileType=pdf, ComponentLink3Description="Package Specification", ComponentLink3URL=http://www.ti.com/litv/pdf/mpds028d, DatasheetVersion=SBOS099C, Eco-Plan="Green (RoHS & no Sb/Br)", IIB(Max)(pA)=10, Iq per channel(Max)(mA)=8.5, Mounting Technology="Surface Mount", Number of Channels=2, Offset Drift(Typ)(uV/C)=4, PackageDescription="8-Pin Thin Small Outline, Body 3 x 3 mm, Pitch 0.65 mm", PackageReference=DGK0008A, PackageVersion="4073329/E, 05/2006", PartNumber=OPA2350EA/2K5, Slew Rate(Typ)(V/us)=22, Sub Family="Low Input Bias Current Amp (<=10pA), Low Offset Voltage Amplifier (<=500uV), Low Supply Voltage Amplifier (<=2.7V), Precision Amplifier", Supplier 1=Digi-Key, Supplier 2=Digi-Key, Supplier 3=Digi-Key, Supplier 4=Mouser, Supplier 5=Farnell, Supplier 6=Newark, Supplier Part Number 2=296-39117-6-ND, Supplier Part Number 3=296-39117-2-ND, Supplier Part Number 4=595-OPA2350EA/2K5, Supplier Part Number 5=3004918, Supplier Part Number 6=28AH4511, Vio (25C)(Max)(mV)=1, Vn at 1kHz(Typ)(nV/rtHz)=18
U6: library part CMP-0859-00474-3, "Dual Buffer Gate, DCK0006A, LARGE T&R", F @ Nom Voltage(Max)(Mhz)=150, Generic Part Number=SN74LVC2G34, ICC @ Nom Voltage(Max)(mA)=0.01, Manufacturer="Texas Instruments", Operating Temperature Range(C)="-40 to 125,-40 to 85", Rating=Catalog, tpd @ Nom Voltage(Max)(ns)=8.6,4.4,4.1,3.2, Voltage(Nom)(V)=1.8,2.5,3.3,5, 3-State Output=No, Bits(#)=2, DatasheetVersion=SCES359I, Input Type=CMOS/TTL, Logic=True, Output Drive (IOL/IOH)(Max)(mA)=32/-32, Output Type=CMOS, PackageReference=DCK0006A, Schmitt Trigger=No, Sub-Family="Non-Inverting Buffer/Driver", Technology Family=LVC, VCC(Max)(V)=5.5, VCC(Min)(V)=1.65
U13: library part CMP-0272-00834-2, "High-Speed, Single-Supply, Rail-to-Rail Operational Amplifier MicroAmplifier(TM) Series, 2.7 to 5.5 V, -55 to 150 degC, 16-pin SOP (DBQ16), Green (RoHS & no Sb/Br)", Manufacturer="Texas Instruments", Total Supply Voltage(Max)(+5V is 5, +/-5V is 10)=5.5, Total Supply Voltage(Min)(+5V is 5, +/-5V is 10)=2.7, CMRR(Min)(dB)=66, Code_JEDEC=MO-137, ComponentLink1Description="Manufacturer URL", ComponentLink1URL=http://www.ti.com/, ComponentLink2Description=Datasheet, ComponentLink2URL=http://www.ti.com/general/docs/lit/getliterature.tsp?genericPartNumber=OPA4350&fileType=pdf, ComponentLink3Description="Package Specification", ComponentLink3URL=http://www.ti.com/litv/pdf/msoi004g, DatasheetVersion=SBOS099C, Eco-Plan="Green (RoHS & no Sb/Br)", IIB(Max)(pA)=10, Iq per channel(Max)(mA)=7.5, Mounting Technology="Surface Mount", Number of Channels=4, Offset Drift(Typ)(uV/C)=4, PackageDescription="16-Pin, Plastic Small Outline, Body 3.9 x 4.9 mm, Pitch 0.635 mm", PackageReference=DBQ16, PackageVersion="4073301-2/H, 10/2008", PartNumber=OPA4350EA/250G4, Slew Rate(Typ)(V/us)=22, Sub Family="Low Input Bias Current Amp (<=10pA), Low Offset Voltage Amplifier (<=500uV), Low Supply Voltage Amplifier (<=2.7V), Precision Amplifier", Vio (25C)(Max)(mV)=0.5, Vn at 1kHz(Typ)(nV/rtHz)=18
U100 U102 U104 U106: library part CMP-0786-00346-1, "300 mA, Low Quiescent Current, CMOS Linear Regulator, 2.3 to 5.5 V Vin, 3.3 V Vout, Industrial, 5-pin SOT23 (UJ-5), Reel", Manufacturer="Analog Devices", Preset Vout Values (V)=3.3, Supply Current IGND @ Small Load=45uA, Code_JEDEC=MO-193-AB, ComponentLink1Description="Manufacturer URL", ComponentLink1URL=http://www.analog.com/en/index.html, ComponentLink2Description=Datasheet, ComponentLink2URL=http://www.analog.com/static/imported-files/data_sheets/ADP122_123.pdf, ComponentLink3Description="Package Specification", ComponentLink3URL=http:/www.analog.com/static/imported-files/packages/PKG_PDF/TSOT(UJ)/UJ_5.pdf, ComponentLink4Description="URL Link1", ComponentLink4URL="Product URL:http://www.analog.com/en/ADP122/productSearch.html", DatasheetVersion="Rev. E", Iout max=300mA, Mounting Technology="Surface Mount", PackageDescription="5-Pin Thin Small Outline Transistor Package, Body 2.9 x 1.6 mm, Pitch 0.95 mm", PackageReference=UJ-5, PackageVersion="100708-A, 10/2008", Packing=Reel, PartNumber=ADP122AUJZ-3.3-R7, Vin (max) (V)=5.5, Vin (min) (V)=2.3
U101: "High Accuracy Current Sensor IC with 1.5MHz 3dB Bandwidth and Isolation ±20A,, 3.3V, Ratiometric", Current Rating=20A, Manufacturer=ACEINNA, Mouser Part Number=438-MCA1101-20-3, Package/Case="SOIC 16", Supply voltage=3.3V, Datasheet Link=https://www.mouser.cl/datasheet/2/940/6020-1104-01_B_Datasheet_2c_Current_Sensor_Fix_Gai-1622847.pdf, Mouser Price/Stock=https://www.mouser.com/Search/Refine.aspx?Keyword=438-MCA1101-20-3
U103: "IC RELAY PHOTOVO 400V 120MA 6SMD", Case/Package=SMD/SMT, Input Current=25mA, Isolation Voltage=4kV, Load Current=120mA, Manufacturer="International Rectifier", Max Operating Temperature=85°C, Max Output Voltage=400V, Min Operating Temperature=-40°C, On-State Resistance=35R, Package Quantity=50, Supplier Part Number 1=PVT412LSPBF-ND, Approvals=UL, Category="Solid State Relays", ComponentLink1Description=https://datasheet.ciiva.com/15141/getdatasheetpartid-385077-15141601.pdf?src-supplier=Verical, ComponentLink1URL=https://datasheet.ciiva.com/15141/getdatasheetpartid-385077-15141601.pdf?src-supplier=Verical, ComponentLink2Description=https://datasheet.ciiva.com/26924/pvt412lspbf-26924616.pdf?src-supplier=IIIC, ComponentLink2URL=https://datasheet.ciiva.com/26924/pvt412lspbf-26924616.pdf?src-supplier=IIIC, ComponentLink3Description=https://datasheet.ciiva.com/17305/pvt412-17305893.pdf?src-supplier=Avnet+Europe, ComponentLink3URL=https://datasheet.ciiva.com/17305/pvt412-17305893.pdf?src-supplier=Avnet+Europe, ComponentLink4Description=https://datasheet.ciiva.com/2421/pvt412-2421789.pdf?src-supplier=Digi-Key, ComponentLink4URL=https://datasheet.ciiva.com/2421/pvt412-2421789.pdf?src-supplier=Digi-Key, Depth=6.47mm, Height=3.42mm, Lead Free="Lead Free", Length=8.63mm, Manufacturer Part Number=PVT412LSPBF, Max Input Current=25mA, Mount="Surface Mount", Number of Pins=6, Output current=120mA, Output Voltage=400V, Packaging=Rail/Tube, Pricing 1="1=3,23000, 10=3,03100, 25=2,69480, 50=2,55980, 100=2,42510, 250=2,15568, 500=2,02096, 1000=1,88622, 5000=1,81886 (USD)", Radiation Hardening=No, Relay Type=Relay, RoHS=Yes, Stock 1=335, Supplier 1=Digi-Key, Supplier 2=Arrow, Supplier 3=Avnet, Supplier 4=Mouser, Supplier 5=Farnell, Supplier Part Number 2=PVT412LSPBF, Supplier Part Number 3=PVT412LSPBF, Supplier Part Number 4=942-PVT412LSPBF, Supplier Part Number 5=2762281, Termination="Gull Wing", Throw Configuration=SPST,SP, Turn-On Delay Time=2ms
U105: "Full K-Type Thermocouple Amplifier with Cold Junction Compensation, Industrial, 8-pin SOP (RM-8), Tube", Manufacturer="Analog Devices", Supplier Part Number 1=AD8495ARMZ-ND, Code_JEDEC=MO-187-AA, ComponentLink1Description="Manufacturer URL", ComponentLink1URL=http://www.analog.com/en/index.html, ComponentLink2Description=Datasheet, ComponentLink2URL=http://www.analog.com/static/imported-files/data_sheets/AD8494_8495_8496_8497.pdf, ComponentLink3Description="Package Specification", ComponentLink3URL=http://www.analog.com/static/imported-files/packages/PKG_PDF/MSOP%28RM%29/RM_8.pdf, ComponentLink4Description="Product URL", ComponentLink4URL=http://www.analog.com/en/mems-sensors/digital-temperature-sensors/ad8495/products/product.html, DatasheetVersion="Rev. C", Mounting Technology="Surface Mount", PackageDescription="8-Pin Mini Small Outline Package, Body 3 x 3 mm, Pitch 0.65 mm", PackageReference=RM-8, PackageVersion=08/2005, Packing=Tube, PartNumber=AD8495ARMZ, Supplier 1=Digi-Key, Supplier 2=Arrow, Supplier 3=Mouser, Supplier 4=Farnell, Supplier Part Number 2=AD8495ARMZ, Supplier Part Number 3=584-AD8495ARMZ, Supplier Part Number 4=1864707